# Altium PCB PSOC_PCB.PcbDoc
Units mil, origin at the board's own origin, x right, y up, seen from the top; angles counter-clockwise.
Board outline 1938.98 x 1899.61 mil, 2 copper layers (Top Layer, Bottom Layer); 28 components, 47 nets, 134 pads, 32 vias.
Unrouted connection lines stored in the file: 3.
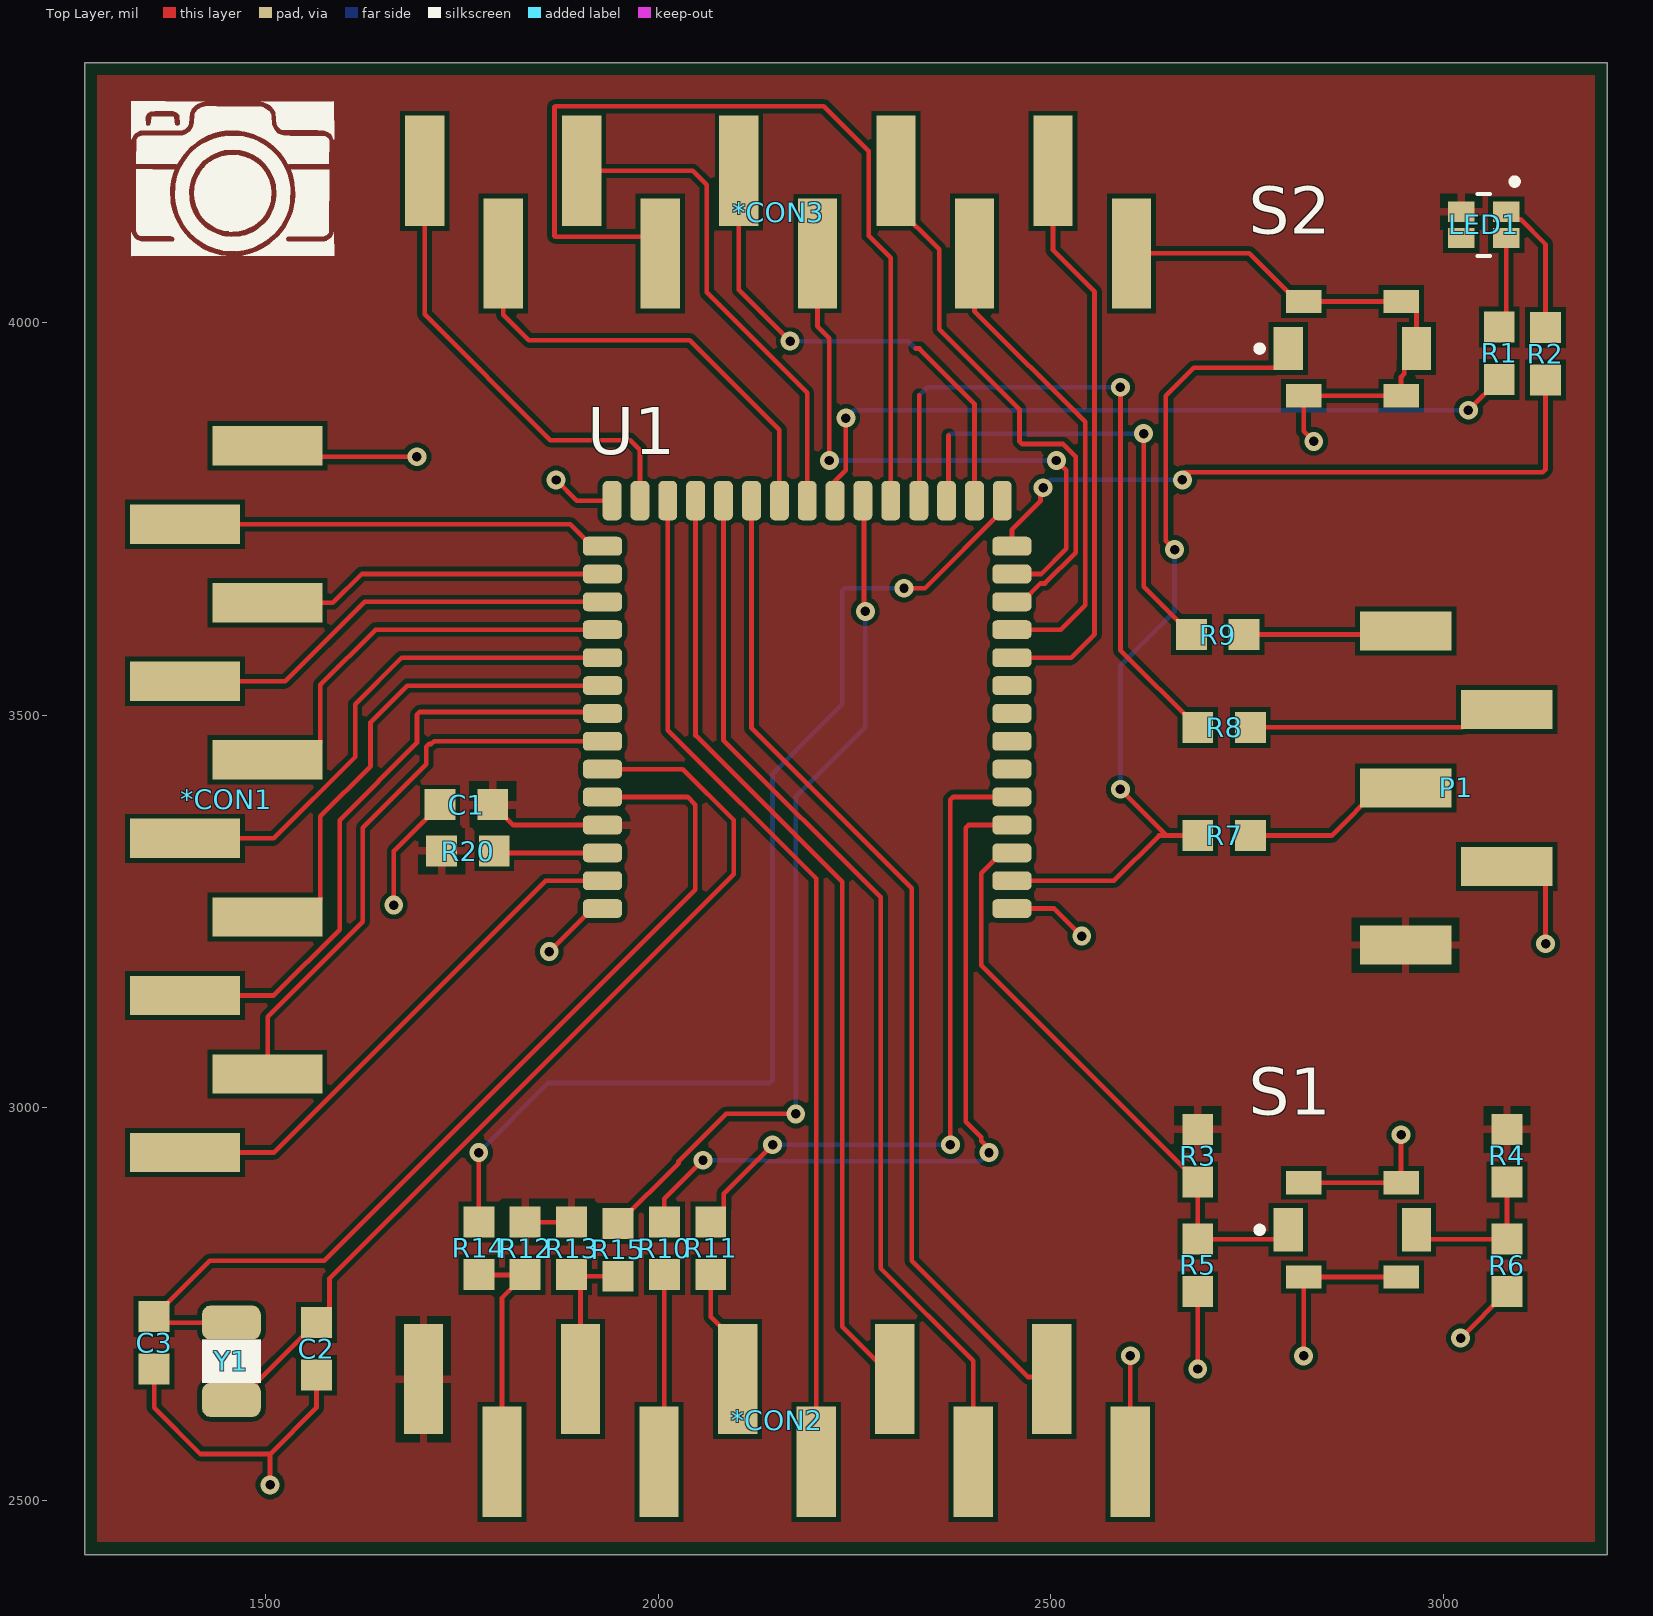
[diagram p0: Top Layer view]
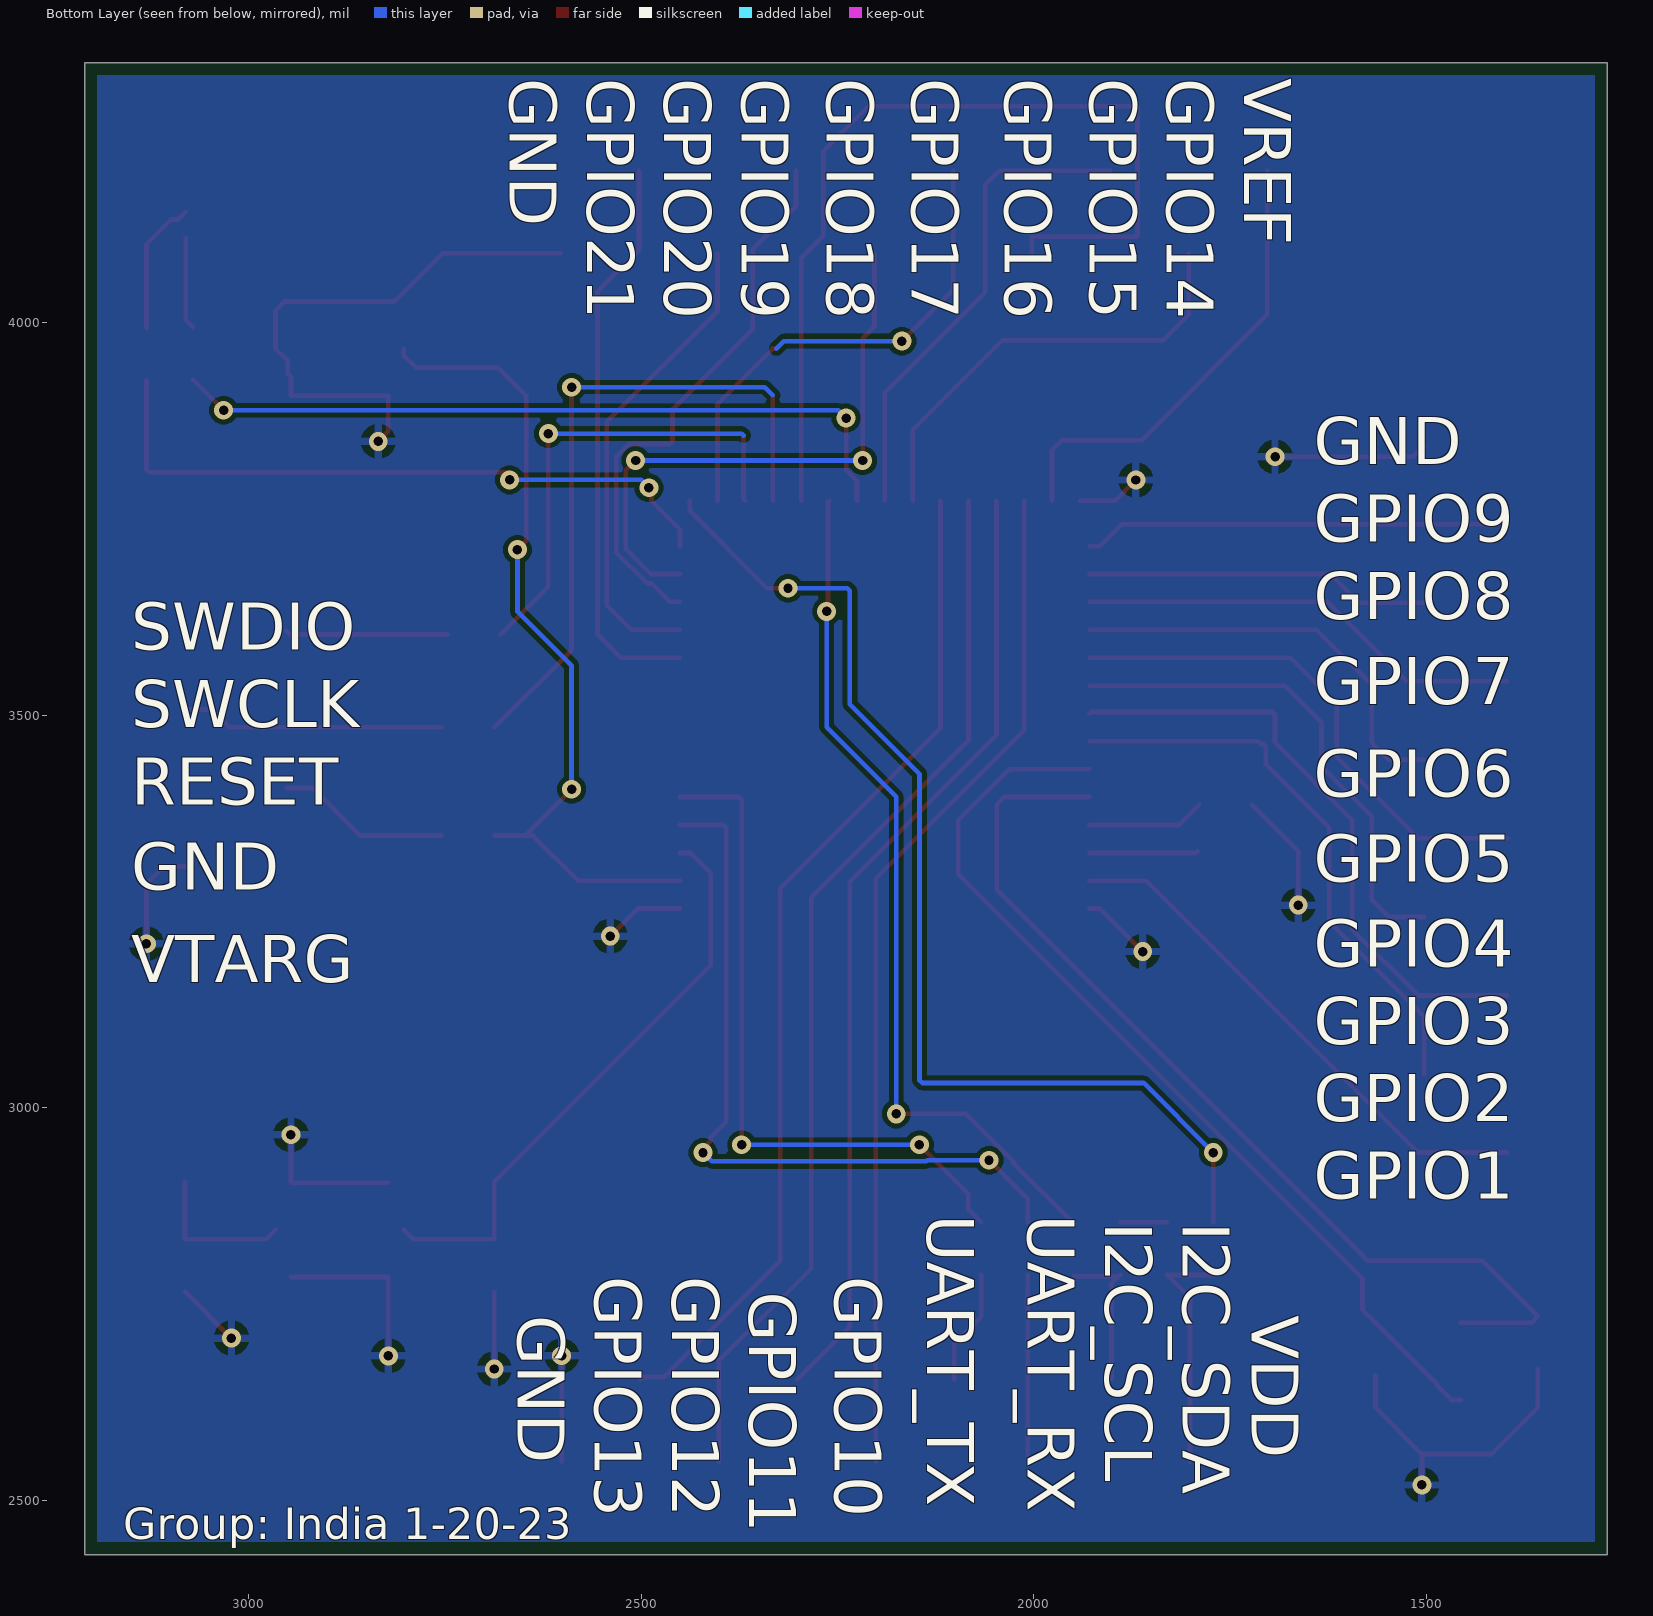
[diagram p1: Bottom Layer view, seen from below]

## Layer stack, top to bottom
Top Solder: solder mask 0.4, Solder Resist, Dk 3.5
Top Layer: signal copper 1.4
Dielectric 1: dielectric 12.6, FR-4, Dk 4.8
Bottom Layer: signal copper 1.4
Bottom Solder: solder mask 0.4, Solder Resist, Dk 3.5

## Board outline
1269.68,2431.1 1269.68,4330.71 3208.66,4330.71 3208.66,2431.1

## Design rules (kind name [scope] priority, off if disabled: settings)
BoardOutlineClearance [All] p1: gap=16 ignorepadtopadclearanceinfootprint=FALSE except(0: Arc-SplitContinuation Track-SplitContinuation SMDPad-SplitContinuation THPad-SplitContinuation Via-SplitContinuation Fill-SplitContinuation Poly-SplitContinuation Region-SplitContinuation Text-SplitContinuation)
Clearance [All] p1: gap=6 ignorepadtopadclearanceinfootprint=FALSE
HoleSize [All] p1: absolutevalues=TRUE maxlimit=245 minlimit=12 maxpercent=80.000 minpercent=20.000
MinimumSolderMaskSliver [All] p1 off: minsoldermaskwidth=10
NetAntennae [All] p1 off: netantennaetolerance=0
PolygonConnect [All] p1: connectstyle=Relief reliefconductorwidth=10 reliefentries=4 polygonreliefangle="90 Angle" airgapwidth=10
RoutingVias [All] p1: holewidth=12 width=24 viastyle="Through Hole" minholewidth=6 minwidth=12 maxholewidth=23.62 maxwidth=47.24
SilkToSilkClearance [All] p1 off: silktosilkclearance=10
SilkToSolderMaskClearance [IsPad] p1 off: minsilkscreentomaskgap=10 clearancetoexposedcopper=TRUE
SolderMaskExpansion [All] p1: expansion=4 istentingtop=FALSE
Width [All] p1: maxlimit=78.74 minlimit=6 preferedwidth=6 minimp=50.000000 maximp=50.000000 favimp=50.000000
25 further rules are at their usual default settings.

## Components (designator, comment, footprint, x,y, rotation, side; value= is the part's Value field where it differs from the comment)
*CON1 "10PIN Header" "10 Pin Header" 1397.64,3142.91 r90 top
*CON2 "10PIN Header" "10 Pin Header" 1901.18,2654.33 r0 top
*CON3 "10PIN Header" "10 Pin Header" 1902.76,4192.91 r0 top
C1 "10uF" Capacitor 1789.37,3385.83 r180 top
C2 "22 pF" Capacitor 1564.96,2659.45 r90 top
C3 "22 pF" Capacitor 1358.27,2667.32 r90 top
LED1 "LTST-C19HE1WT" LED_LTST-C19HE1WT 3051.18,4124.02 r270 top
P1 "5-Pin Programming Header" "5pin Progamming Header" 2951.57,3407.09 r90 top
R1 "330 ohm" Resistor 3070.87,3994.09 r270 top
R2 "470 ohm" Resistor 3129.79,3993.36 r270 top
R3 "10k" Resistor 2687.01,2972.44 r270 top
R4 "0 ohm" Resistor 3080.71,2972.44 r270 top
R5 "10k" Resistor 2687.01,2832.68 r270 top
R6 "0 ohm" Resistor 3080.71,2832.68 r270 top
R7 "0 ohm" Resistor 2687.01,3346.46 r0 top
R8 "0 ohm" Resistor 2687.01,3484.25 r0 top
R9 "0 ohm" Resistor 2679.13,3602.36 r0 top
R10 "0 ohm" Resistor 2007.87,2854.33 r270 top
R11 "0 ohm" Resistor 2066.93,2854.33 r270 top
R12 "4.7K" Resistor 1830.71,2787.4 r90 top
R13 "4.7K" Resistor 1889.76,2787.4 r90 top
R14 "0  ohm" Resistor 1771.65,2854.33 r270 top
R15 "0 ohm" Resistor 1948.82,2852.36 r270 top
R20 "0 ohm" Resistor 1724.41,3326.77 r0 top
S1 "PTS820J25MSMTRLFS" PTS820J25MSMTRLFS 2883.86,2844.49 r0 top
S2 "PTS820J25MSMTRLFS" PTS820J25MSMTRLFS 2883.86,3966.54 r0 top
U1 "PSOC 6" "PSoC 6" 1914.17,3059.45 r0 top
Y1 "32.768 KHz" ECX-31B 1456.69,2677.17 r270 top

## Footprints (in the part's own frame and the unit in brackets; to place one, negate y for a bottom-side part, rotate by r counter-clockwise, add the part's x,y. Pads: shape width x height; smd on the part's side, far side on the other; paste and mask are expansions set on the pad)
"5pin Progamming Header" [mm]
  rect 1.27x2.96 smd: 1(-5.08,0) 2(-2.54,-3.28) 3(0,0) 4(2.54,-3.28) 5(5.08,0)
  body extent -6.5,-3 6.5,0, height 10.81
"10 Pin Header" [mm]
  rect 1.27x3.56 smd: P1(-5.08,0) P2(-2.54,-2.67) P3(0,0) P4(2.54,-2.67) P5(5.08,0) P6(7.62,-2.67) P7(10.16,0) P8(12.7,-2.67) P9(15.24,0) P10(17.78,-2.67)
  body extent -7,-2.5 20,0.1, height 5.84
Capacitor [mm]
  rect 1x1 smd: 1(0,0) 2(1.7,0)
  body extent -0.62,-0.6 2.3,0.6, height 1
ECX-31B [mm]
  rrect50% 1.1x1.9 smd: 1(-1.25,0) 2(1.25,0)
  silkscreen extent -0.7,-0.95 0.7,0.95, body extent -1.9,-1 1.9,1, height 0.9
LED_LTST-C19HE1WT [mm]
  rect 0.65x0.85 smd: 1(-0.425,0.725) 2(0.425,0.725) 3(0.425,-0.725) 4(-0.425,-0.725)
  silkscreen extent -1.5,-0.2 1,1.1
"PSoC 6" [mm] "Analog and Digital blocks with flexible automatic routing"
  rrect50% 1.27x0.61 smd: GND(0.38,4.93) GND(13.62,4.93) P0.0(0.38,8.54) P0.1(0.38,9.44) P0.4(13.62,6.73) P0.5(0.38,5.83) P5.0(13.62,8.54) P5.1(13.62,7.63) P5.2(13.62,9.44) P5.3(13.62,10.34) P5.5(13.62,11.24) P5.6(13.62,14.85) P6.3(13.62,16.65) P7.7(13.62,15.75) P9.3(0.38,12.14) P9.4(0.38,16.65) P10.0(0.38,15.75) P10.1(0.38,14.85) P10.2(13.62,13.95) P10.3(0.38,10.34) P10.4(0.38,11.24) P10.5(0.38,13.95) P10.6(0.38,13.04) P12.6(13.62,13.04) P12.7(13.62,12.14) Vbackup(0.38,6.73) VDD(0.38,7.63) XRES(13.62,5.83)
  rrect50% 0.61x1.27 smd: GND(0.69,18.12) P5.4(9.7,18.12) P6.2(12.41,18.12) P6.4(8.8,18.12) P6.5(13.31,18.12) P6.6(11.51,18.12) P6.7(10.61,18.12) P7.1(7.9,18.12) P7.2(7,18.12) P9.0(2.49,18.12) P9.1(3.39,18.12) P9.2(6.1,18.12) P9.5(4.29,18.12) P9.6(5.2,18.12) VREF(1.59,18.12)
  body extent 0,0 14,18.5, height 2
PTS820J25MSMTRLFS [mm]
  rect 0.95x1.4 smd: 1(-2.075,0) 2(2.075,0)
  rect 1.15x0.75 smd: G1(-1.575,-1.525) G2(1.575,-1.525) G3(1.575,1.525) G4(-1.575,1.525)
  silkscreen extent -3.1,-0.1 -2.9,0.1, body extent -2.45,-1.83 2.45,1.83, height 1.6
Resistor [mm]
  rect 1x1 smd: 1(0,0) 2(1.7,0)
  body extent -0.62,-0.6 2.3,0.6, height 1

## Part data
C1 C2 C3: library part "Cap 0603"
LED1: "Red, Green, Blue _RGB_ 624nm Red, 525nm Green, 470nm Blue LED Indication - Discrete 2.1V Red, 3.35V Green, 3.35V Blue 0606 _1616 Metric_", Package="0606 Lite-On", Availability=Unavailable, MF="Lite-On Inc.", MP=LTST-C19HE1WT, Price=None, SnapEDA_Link=https://www.snapeda.com/parts/LTST-C19HE1WT/Lite-On%20Inc./view-part/423425/?ref=snap
R1 R2 R3 R4 R5 R6 R7 R8 R9 R10 R11 R12 R13 R14 R15 R20: library part Resistor
S1 S2: "Switch", Manufacturer_Name="C & K COMPONENTS", Mouser Part Number=611-PTS820J25MSMTR, Datasheet Link=https://www.ckswitches.com/media/1474/pts820.pdf, Height=1.5mm, Manufacturer_Part_Number=PTS820J25MSMTRLFS, Mouser Price/Stock=https://www.mouser.co.uk/ProductDetail/CK/PTS820J25MSMTRLFS?qs=UxeAxwACbqmM7fS1sTfuhg%3D%3D
Y1: library part ECX-31B, "The miniature ECX-31B is the most cost effective SMD Tuning / Fork Crystal today. The 3.2 x 1.5 x 0.9 mm ceramic package is / ideal high density circuit boards. Offerings in extended / temperature and frequency tolerance as low at ±10 ppm."

## Via types
v1: diameter 24, hole 12, Top Layer to Bottom Layer, 32 vias

## Nets (pads, with @x,y where several pads share a name; then routed paths per layer and width w, separated by ;. In a path a pad name is that pad's centre, name@x,y a point inside that pad or via, vN(x,y) a via of type N, cw(c..) or ccw(c..) an arc to the next point about the centre after c; other vN are vias at no path point)
GND: *CON1.P10 *CON2.P10 *CON3.P10 C1.2 C2.1 C3.1 P1.2 R5.2 R6.2 S1.G1 S1.G2 S1.G3 S1.G4 S2.2 S2.G1 S2.G2 S2.G3 S2.G4 U1.GND | length 2568.1
  Top Layer w6: C3.1 1358.27,2618.11 1417.32,2559.06 1505.91,2559.06 ; *CON1.P10 1516.93,3828.74 v1(1692.91,3828.74) ; v1(1505.91,2519.68) 1505.91,2559.06 ; C2.1 1564.96,2618.11 1505.91,2559.06 ; v1(1663.39,3257.87) 1663.39,3326.77 C1.2 ; v1(1861.42,3198.82) 1916.14,3253.54 U1.GND@1929.13,3253.54 ; v1(1870.08,3799.21) 1896.46,3772.83 U1.GND@1941.34,3772.83 ; U1.GND@2450.39,3253.54 2504.33,3253.54 v1(2539.37,3218.5) ; *CON2.P10 v1(2601.18,2684.25) ; *CON3.P10 2752.75,4087.8 2813.98,4026.57 S2.G4 S2.G3 2953.74,4026.57 2965.55,4014.76 S2.2 2949.85,3950.84 2949.85,3934.24 2945.87,3930.26 S2.G2 S2.G1 2821.85,3861.22 v1(2834.65,3848.43) ; v1(2687.01,2667.32) R5.2 ; v1(2821.85,2684.05) S1.G1 S1.G2 ; S1.G4 S1.G3 v1(2945.87,2965.55) ; v1(3021.65,2706.69) R6.2 ; P1.2 3107.92,3307.09 3129.92,3285.09 v1(3129.92,3208.66)
GPIO1: *CON1.P1 U1.P0.5 | length 674.8
  Top Layer w6: *CON1.P1 1510.56,2942.91 1856.62,3288.98 U1.P0.5
GPIO2: *CON1.P2 U1.P10.3 | length 727.7
  Top Layer w6: *CON1.P2 1502.76,3115.53 1624.02,3236.79 1624.02,3356.3 1704.91,3437.2 1704.91,3459.69 1708.43,3463.21 1711.24,3463.21 1714.76,3466.72 1928.95,3466.72 U1.P10.3
GPIO3: *CON1.P3 U1.P10.4 | length 784.5
  Top Layer w6: *CON1.P3 1510.56,3142.91 1594.49,3226.84 1594.49,3366.14 1692.91,3464.57 1692.91,3500.42 1696.43,3503.94 1927.17,3503.94 U1.P10.4
GPIO4: *CON1.P4 U1.P9.3 | length 643
  Top Layer w6: *CON1.P4 1547.83,3242.91 1569.83,3264.91 1569.83,3371.02 1633.86,3435.04 1633.86,3490.58 1680.68,3537.4 U1.P9.3
GPIO5: *CON1.P5 U1.P10.6 | length 666.1
  Top Layer w6: *CON1.P5 1510.56,3342.91 1614.17,3446.52 1614.17,3513.78 1673.23,3572.83 U1.P10.6
GPIO6: *CON1.P6 U1.P10.5 | length 538
  Top Layer w6: *CON1.P6 1547.83,3442.91 1569.83,3464.91 1569.83,3538.34 1640.16,3608.66 U1.P10.5
GPIO7: *CON1.P7 U1.P10.1 | length 573.4
  Top Layer w6: *CON1.P7 1525.2,3542.91 1626.38,3644.09 U1.P10.1
GPIO8: *CON1.P8 U1.P10.0 | length 441.5
  Top Layer w6: *CON1.P8 1585.83,3642.91 1622.44,3679.53 U1.P10.0
GPIO9: *CON1.P9 U1.P9.4 | length 543.1
  Top Layer w6: *CON1.P9 1888.19,3742.91 1916.14,3714.96 U1.P9.4
GPIO10: *CON2.P6 U1.P9.0 | length 1301.9
  Top Layer w6: U1.P9.0 2012.2,3480.8 2201.18,3291.82 *CON2.P6
GPIO11: *CON2.P7 U1.P9.1 | length 1223.5
  Top Layer w6: U1.P9.1 2047.64,3474.02 2234.25,3287.4 2234.25,2721.26 *CON2.P7
GPIO12: *CON2.P8 U1.P9.5 | length 1355.4
  Top Layer w6: U1.P9.5 2083.07,3468.11 2283.46,3267.72 2283.46,2795.28 2401.18,2677.56 *CON2.P8
GPIO13: *CON2.P9 U1.P9.6 | length 1293
  Top Layer w6: U1.P9.6 2118.9,3483.1 2322.83,3279.17 2322.83,2805.12 2470.7,2657.26 2498.26,2657.26 *CON2.P9
GPIO14: *CON3.P2 U1.P9.2 | length 580.6
  Top Layer w6: *CON3.P2 1802.76,4009.76 1835.51,3977 2040.33,3977 2154.33,3863 U1.P9.2
GPIO15: *CON3.P3 U1.P7.2 | length 621.9
  Top Layer w6: *CON3.P3 1902.76,4193 2044,4193 2062,4175 2062,4038 2189.76,3910.24 U1.P7.2
GPIO16: *CON3.P4 U1.P5.4 | length 1201.2
  Top Layer w6: *CON3.P4 2002.76,4109 1869,4109 1868,4110 1868,4274 1869,4275 2211,4275 2268,4218 2268,4110 2296.06,4081.94 U1.P5.4
GPIO17: *CON3.P5 U1.P6.2 | length 635.3
  Top Layer w6: *CON3.P5 2102.76,4041.24 v1(2168,3976) ; 2327.81,3966.54 2332.68,3966.54 2402.76,3896.46 U1.P6.2
  Bottom Layer w6: v1(2168,3976) 2318.34,3976 2327.81,3966.54
GPIO18: *CON3.P6 U1.P7.7 | length 759.3
  Top Layer w6: *CON3.P6 2202.76,3995 2218,3979.76 v1(2218,3824) ; U1.P7.7 2487.5,3679.53 2519.69,3711.71 2519.69,3811.32 v1(2507,3824)
  Bottom Layer w6: v1(2218,3824) v1(2507,3824)
GPIO19: *CON3.P7 U1.P5.6 | length 718.8
  Top Layer w6: *CON3.P7 2302.76,4148 2358,4092.76 2358,3991 2460,3889 2460,3848.51 2463.51,3845 2515.7,3845 2531.69,3829.01 2531.69,3706.74 2492.47,3667.53 2486.82,3667.53 2463.39,3644.09 U1.P5.6
GPIO20: *CON3.P8 U1.P10.2 | length 612.5
  Top Layer w6: *CON3.P8 2402.76,4014.24 2543.69,3873.32 2543.69,3639.85 2512.5,3608.66 U1.P10.2
GPIO21: *CON3.P9 U1.P12.6 | length 729.8
  Top Layer w6: U1.P12.6 2525.83,3572.83 2555.69,3602.69 2555.69,4039.07 2502.76,4092 *CON3.P9
I2C_SCL: *CON2.P3 R13.1 R15.2 | length 194.9
  Top Layer w6: R13.1 R13.1@1891.73,2785.43 ; *CON2.P3 1901.18,2775.98 R13.1@1891.73,2785.43 ; R15.2 R13.1@1891.73,2785.43
I2C_SDA: *CON2.P2 R12.1 R14.2 | length 309.2
  Top Layer w6: R14.2 1772.06,2787 R12.1@1830.31,2787 ; *CON2.P2 1801.18,2757.88 R12.1@1830.31,2787 ; R12.1 R12.1@1830.31,2787
NetR4_2: R4.2 R6.1 S1.2 | length 192.9
  Top Layer w6: S1.2 2977.36,2832.68 R6.1 R4.2
P0.0: C3.2 U1.P0.0 Y1.1 | length 1246.2
  Top Layer w6: Y1.1 1366.14,2726.38 C3.2 1429.13,2805.12 1574.8,2805.12 2047.24,3277.56 2047.24,3385.83 2037.4,3395.67 U1.P0.0
P0.1: C2.2 U1.P0.1 Y1.2 | length 1204
  Top Layer w6: Y1.2 1468.2,2627.95 1486.26,2646.01 1486.26,2647.68 C2.2 1581.65,2743.06 1581.65,2782.6 2096.29,3297.24 2096.29,3366.31 2031.5,3431.1 U1.P0.1
P0.4: R3.2 R5.1 S1.1 U1.P0.4 | length 749.7
  Top Layer w6: U1.P0.4 2437.4,3324.41 2411.42,3298.43 2411.42,3181.1 R3.2 R5.1 2790.36,2832.68 S1.1
P5.0: R11.1 U1.P5.0 | length 876.6
  Top Layer w6: R11.1 2083.62,2871.02 2083.62,2890.7 v1(2145.67,2952.76) ; v1(2372.05,2952.76) 2372.05,3392.15 2375.56,3395.67 U1.P5.0
  Bottom Layer w6: v1(2145.67,2952.76) v1(2372.05,2952.76)
P5.1: R10.1 U1.P5.1 | length 954.2
  Top Layer w6: R10.1 2007.87,2883.86 v1(2057.09,2933.07) ; v1(2421.26,2942.91) 2421.26,2947.78 2411.42,2957.63 2411.42,2962.6 2391.73,2982.28 2391.73,3356.3 2395.28,3359.84 U1.P5.1
  Bottom Layer w6: v1(2057.09,2933.07) 2135.66,2933.07 2136.97,2931.76 2410.1,2931.76 v1(2421.26,2942.91)
P6.3: R2.2 U1.P6.3 | length 857.6
  Top Layer w6: U1.P6.3 2450.39,3735.97 2486.71,3772.29 2486.71,3785.93 v1(2490.16,3789.37) ; v1(2667.46,3799.35) 2670.9,3802.79 2670.9,3809.12 2670.97,3809.19 3126.27,3809.19 3129.79,3812.71 R2.2
  Bottom Layer w6: v1(2490.16,3789.37) 2500.14,3799.35 v1(2667.46,3799.35)
P6.4: R15.1 U1.P6.4 | length 1104.2
  Top Layer w6: R15.1 2025.97,2929.52 2025.97,2931.66 2086.44,2992.13 v1(2175.2,2992.13) ; U1.P6.4 2262.2,3771.26 2262.2,3633.46 v1(2263.78,3631.89)
  Bottom Layer w6: v1(2175.2,2992.13) 2175.2,3395.67 2263.78,3484.25 v1(2263.78,3631.89)
P6.5: R14.1 U1.P6.5 | length 1419.5
  Top Layer w6: R14.1 v1(1771.65,2942.91) ; v1(2312.99,3661.42) 2339.77,3661.42 2438.19,3759.84 U1.P6.5
  Bottom Layer w6: v1(1771.65,2942.91) 1860.24,3031.5 2142.15,3031.5 2145.67,3035.01 2145.67,3425.2 2234.25,3513.78 2234.25,3657.9 2237.77,3661.42 v1(2312.99,3661.42)
P6.6: R9.1 U1.P6.6 | length 614.6
  Top Layer w6: U1.P6.6 2369.68,3775.2 2369.68,3855.91 ; v1(2618.11,3858.27) 2618.11,3663.39 R9.1
  Bottom Layer w6: 2369.68,3855.91 2372.05,3858.27 v1(2618.11,3858.27)
P6.7: R8.1 U1.P6.7 | length 868.8
  Top Layer w6: U1.P6.7 2332.28,3773.23 2332.28,3907.09 ; v1(2588.58,3917.32) 2588.58,3582.68 R8.1
  Bottom Layer w6: 2332.28,3907.09 2342.52,3917.32 v1(2588.58,3917.32)
P7.1: R1.2 U1.P7.1 | length 963.1
  Top Layer w6: U1.P7.1 2225.2,3798 2239,3811.8 v1(2239,3878) ; v1(3031.7,3888) R1.2
  Bottom Layer w6: v1(2239,3878) 2249,3888 v1(3031.7,3888)
RESET: P1.3 R7.2 | length 222.7
  Top Layer w6: R7.2 2857.68,3346.46 2918.31,3407.09 P1.3
SWDCLK: P1.4 R8.2 | length 336.2
  Top Layer w6: R8.2 3024.61,3484.25 3047.44,3507.09 P1.4
SWDIO: P1.5 R9.2 | length 207.5
  Top Layer w6: R9.2 2946.85,3602.36 P1.5
UART_RX: *CON2.P4 R10.2 | length 241
  Top Layer w6: *CON2.P4 2007.87,2555.9 R10.2
UART_TX: *CON2.P5 R11.2 | length 147.3
  Top Layer w6: R11.2 2066.93,2733.66 2101.18,2699.41 *CON2.P5
VBACKUP: R20.2 U1.Vbackup | length 138.8
  Top Layer w6: R20.2 1793.7,3324.41 U1.Vbackup
VDD: *CON2.P1 C1.1 LED1.4 P1.1 R3.1 R4.1 R12.2 R13.2 R20.1 U1.VDD | length 209.6
  Top Layer w6: C1.1 1815.35,3359.84 U1.VDD ; R12.2 R13.2
Vgreen: LED1.2 R1.1 | length 116.9
  Top Layer w6: R1.1 3079.72,4002.95 LED1.2
Vred: LED1.1 R2.1 | length 173.3
  Top Layer w6: LED1.1 3089.52,4130.95 3098.31,4130.95 3129.79,4099.48 R2.1
VREF: *CON3.P1 U1.VREF | length 593
  Top Layer w6: *CON3.P1 1702.76,4010 1862.76,3850 1964.27,3850 1976.77,3837.5 U1.VREF
XRES: R7.1 S2.1 U1.XRES | length 1063.7
  Top Layer w6: U1.XRES 2580.31,3288.98 2637.79,3346.46 2647.64,3346.46 ; v1(2588.58,3405.51) 2647.64,3346.46 ; v1(2657.48,3710.63) 2646.46,3721.65 2646.46,3906.3 2682.13,3941.98 2786.47,3941.98 2802.17,3957.68 S2.1 ; R7.1 2647.64,3346.46
  Bottom Layer w6: v1(2588.58,3405.51) 2588.58,3562.99 2657.48,3631.89 v1(2657.48,3710.63)
pads on no net: LED1.3 U1.P5.2 U1.P5.3 U1.P5.5 U1.P12.7

## Polygon pours and split planes (outlines as drawn)
GND on Bottom Layer "GND_L02_P001" (solid, pour order 1): 1269.68,4330.71 3208.66,4330.71 3208.66,2431.1 1269.68,2431.1
VDD on Top Layer "VDD_L01_P000" (solid, pour order 0): 1269.68,4330.71 3208.66,4330.71 3208.66,2431.1 1269.68,2431.1

## Silkscreen, mask and mechanical layers (free items; w line width, h text height)
Top Overlay:
  drawing of 7 lines, arcs and shapes, not listed
Bottom Overlay:
  text "VREF" at 1732.13,4310.87 h60 r90
  text "GPIO14" at 1830.55,4310.87 h60 r90
  text "GPIO15" at 1928.98,4310.87 h60 r90
  text "GPIO16" at 2037.24,4310.87 h60 r90
  text "GPIO17" at 2155.35,4310.87 h60 r90
  text "GPIO18" at 2263.62,4310.87 h60 r90
  text "GPIO19" at 2371.89,4310.87 h60 r90
  text "GPIO20" at 2470.31,4310.87 h60 r90
  text "GPIO21" at 2568.74,4310.87 h60 r90
  text "GND" at 2667.17,4310.87 h60 r90
  text "GND" at 1643.54,3819.06 h60
  text "GPIO9" at 1643.54,3720.63 h60
  text "GPIO8" at 1643.54,3622.2 h60
  text "SWDIO" at 3149.45,3582.83 h60
  text "GPIO7" at 1643.54,3513.94 h60
  text "SWCLK" at 3149.45,3484.41 h60
  text "GPIO6" at 1643.54,3395.83 h60
  text "RESET" at 3149.45,3385.98 h60
  text "GPIO5" at 1643.54,3287.56 h60
  text "GND" at 3149.45,3277.72 h60
  text "GPIO4" at 1643.54,3179.29 h60
  text "VTARG" at 3149.45,3159.61 h60
  text "GPIO3" at 1643.54,3080.87 h60
  text "GPIO2" at 1643.54,2982.44 h60
  text "GPIO1" at 1643.54,2884.02 h60
  text "UART_RX" at 2007.56,2864.02 h60 r90
  text "UART_TX" at 2135.51,2864.02 h60 r90
  text "I2C_SDA" at 1810.71,2854.17 h60 r90
  text "I2C_SCL" at 1909.14,2854.17 h60 r90
  text "GPIO10" at 2253.78,2785.28 h60 r90
  text "GPIO12" at 2460.47,2785.28 h60 r90
  text "GPIO13" at 2558.9,2785.28 h60 r90
  text "GPIO11" at 2362.05,2765.59 h60 r90
  text "VDD" at 1722.28,2736.06 h60 r90
  text "GND" at 2657.32,2736.06 h60 r90
  text "Group: India 1-20-23" at 3159.45,2450.79 h40
Board Outline:
  the board outline again, w10